# EAGLE board extender panel (EAGLE 6.3)
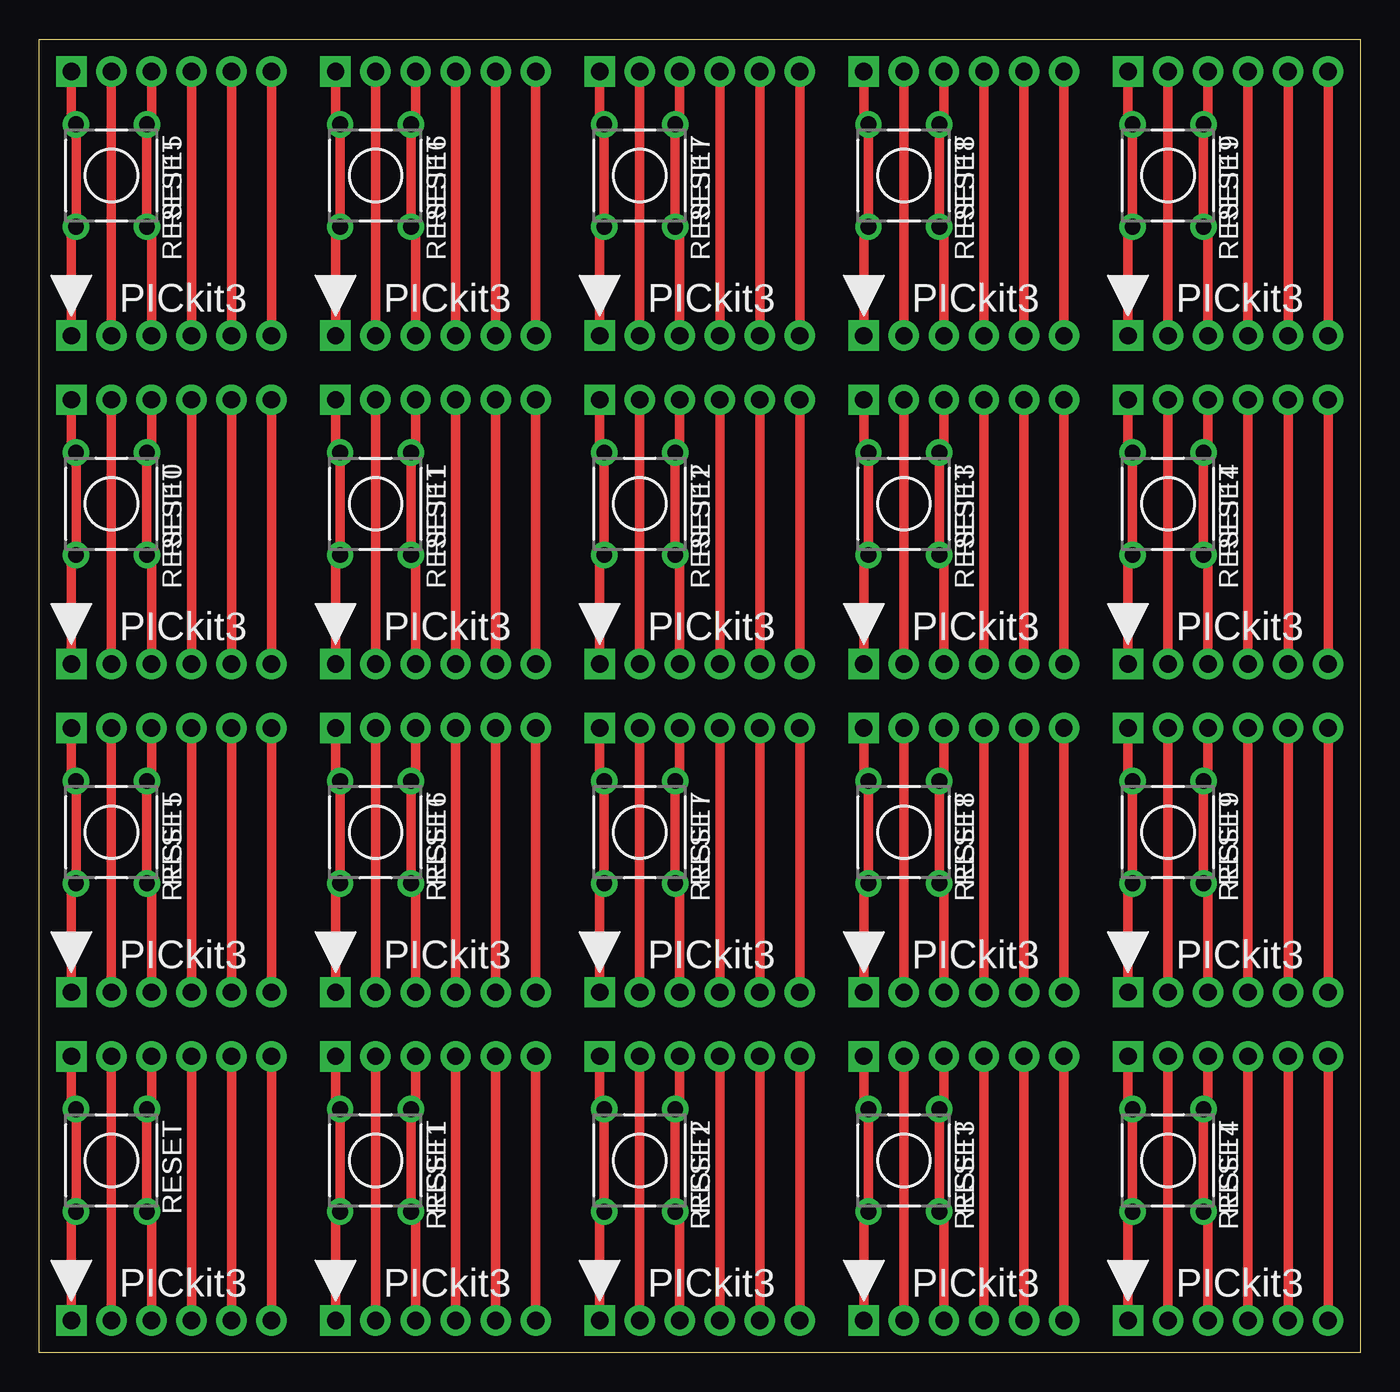
[diagram p0: board, top side]

Size 83.82 x 83.31 mm. Coordinates in mm from the lower left corner, seen from the top.
Outline: 0,83.31 83.82,83.31 83.82,0 0,0 0,83.31
Copper layers (1*16): Top 0.035mm / dielectric 1.5mm / Bottom 0.035mm
Design rules "default": minimum track width 10mil, minimum drill 24mil, track to track 8mil, track to pad 8mil, pad to pad 8mil, via to via 8mil, smd to smd 8mil, copper to edge 40mil, drill to drill 8mil, minimum pad ring 10mil, minimum via ring 8mil, stop-mask expansion 4mil, vias tented up to drill 0mil, thermal gap 10mil

## Footprints (pad centres in the part's own frame; a part is rotated, then mirrored left to right if it is on the bottom)
TL1105 = drill 1 pad 1.676: 1 -2.25,3.25; 2 2.25,3.25; 3 -2.25,-3.25; 4 2.25,-3.25
PINS_6_PICKIT3 = drill 1.1 pad 1.93 square: 1 0,0 | drill 1.1 pad 1.93: 2 0,-2.54; 3 0,-5.08; 4 0,-7.62; 5 0,-10.16; 6 0,-12.7
PINS_6 = drill 1.1 pad 1.93 square: 1 0,0 | drill 1.1 pad 1.93: 2 2.54,0; 3 5.08,0; 4 7.62,0; 5 10.16,0; 6 12.7,0

## Placement (x,y rotation side)
RESET  [TL1105]  4.57,12.19 180 top
RESET1  [TL1105]  21.34,12.19 180 top
RESET2  [TL1105]  38.1,12.19 180 top
RESET3  [TL1105]  54.86,12.19 180 top
RESET4  [TL1105]  71.63,12.19 180 top
RESET5  [TL1105]  4.57,33.02 180 top
RESET6  [TL1105]  21.34,33.02 180 top
RESET7  [TL1105]  38.1,33.02 180 top
RESET8  [TL1105]  54.86,33.02 180 top
RESET9  [TL1105]  71.63,33.02 180 top
RESET10  [TL1105]  4.57,53.85 180 top
RESET11  [TL1105]  21.34,53.85 180 top
RESET12  [TL1105]  38.1,53.85 180 top
RESET13  [TL1105]  54.86,53.85 180 top
RESET14  [TL1105]  71.63,53.85 180 top
RESET15  [TL1105]  4.57,74.68 180 top
RESET16  [TL1105]  21.34,74.68 180 top
RESET17  [TL1105]  38.1,74.68 180 top
RESET18  [TL1105]  54.86,74.68 180 top
RESET19  [TL1105]  71.63,74.68 180 top
U$1  PICKIT3  [PINS_6_PICKIT3]  2.03,2.03 90 top
U$2  PICKIT3  [PINS_6_PICKIT3]  18.8,2.03 90 top
U$3  PICKIT3PLAIN  [PINS_6]  2.03,18.8 0 top
U$4  PICKIT3PLAIN  [PINS_6]  18.8,18.8 0 top
U$5  PICKIT3  [PINS_6_PICKIT3]  35.56,2.03 90 top
U$6  PICKIT3PLAIN  [PINS_6]  35.56,18.8 0 top
U$7  PICKIT3  [PINS_6_PICKIT3]  52.32,2.03 90 top
U$8  PICKIT3PLAIN  [PINS_6]  52.32,18.8 0 top
U$9  PICKIT3  [PINS_6_PICKIT3]  69.09,2.03 90 top
U$10  PICKIT3PLAIN  [PINS_6]  69.09,18.8 0 top
U$11  PICKIT3  [PINS_6_PICKIT3]  2.03,22.86 90 top
U$12  PICKIT3PLAIN  [PINS_6]  2.03,39.62 0 top
U$13  PICKIT3  [PINS_6_PICKIT3]  18.8,22.86 90 top
U$14  PICKIT3PLAIN  [PINS_6]  18.8,39.62 0 top
U$15  PICKIT3  [PINS_6_PICKIT3]  35.56,22.86 90 top
U$16  PICKIT3PLAIN  [PINS_6]  35.56,39.62 0 top
U$17  PICKIT3  [PINS_6_PICKIT3]  52.32,22.86 90 top
U$18  PICKIT3PLAIN  [PINS_6]  52.32,39.62 0 top
U$19  PICKIT3  [PINS_6_PICKIT3]  69.09,22.86 90 top
U$20  PICKIT3PLAIN  [PINS_6]  69.09,39.62 0 top
U$21  PICKIT3  [PINS_6_PICKIT3]  2.03,43.69 90 top
U$22  PICKIT3PLAIN  [PINS_6]  2.03,60.45 0 top
U$23  PICKIT3  [PINS_6_PICKIT3]  18.8,43.69 90 top
U$24  PICKIT3PLAIN  [PINS_6]  18.8,60.45 0 top
U$25  PICKIT3  [PINS_6_PICKIT3]  35.56,43.69 90 top
U$26  PICKIT3PLAIN  [PINS_6]  35.56,60.45 0 top
U$27  PICKIT3  [PINS_6_PICKIT3]  52.32,43.69 90 top
U$28  PICKIT3PLAIN  [PINS_6]  52.32,60.45 0 top
U$29  PICKIT3  [PINS_6_PICKIT3]  69.09,43.69 90 top
U$30  PICKIT3PLAIN  [PINS_6]  69.09,60.45 0 top
U$31  PICKIT3  [PINS_6_PICKIT3]  2.03,64.52 90 top
U$32  PICKIT3PLAIN  [PINS_6]  2.03,81.28 0 top
U$33  PICKIT3  [PINS_6_PICKIT3]  18.8,64.52 90 top
U$34  PICKIT3PLAIN  [PINS_6]  18.8,81.28 0 top
U$35  PICKIT3  [PINS_6_PICKIT3]  35.56,64.52 90 top
U$36  PICKIT3PLAIN  [PINS_6]  35.56,81.28 0 top
U$37  PICKIT3  [PINS_6_PICKIT3]  52.32,64.52 90 top
U$38  PICKIT3PLAIN  [PINS_6]  52.32,81.28 0 top
U$39  PICKIT3  [PINS_6_PICKIT3]  69.09,64.52 90 top
U$40  PICKIT3PLAIN  [PINS_6]  69.09,81.28 0 top

## Library data of the parts
RESET RESET1-RESET19 U$1-U$40 = nolan-utsa

## Nets
N$1: RESET.2 RESET.4 U$1.1 U$3.1
N$2: U$1.2 U$3.2
N$3: RESET.1 RESET.3 U$1.3 U$3.3
N$4: U$1.4 U$3.4
N$5: U$1.5 U$3.5
N$6: U$1.6 U$3.6
N$7: RESET1.2 RESET1.4 U$2.1 U$4.1
N$8: U$2.2 U$4.2
N$9: RESET1.1 RESET1.3 U$2.3 U$4.3
N$10: U$2.4 U$4.4
N$11: U$2.5 U$4.5
N$12: U$2.6 U$4.6
N$13: RESET2.2 RESET2.4 U$5.1 U$6.1
N$14: U$5.2 U$6.2
N$15: RESET2.1 RESET2.3 U$5.3 U$6.3
N$16: U$5.4 U$6.4
N$17: U$5.5 U$6.5
N$18: U$5.6 U$6.6
N$19: RESET3.2 RESET3.4 U$7.1 U$8.1
N$20: U$7.2 U$8.2
N$21: RESET3.1 RESET3.3 U$7.3 U$8.3
N$22: U$7.4 U$8.4
N$23: U$7.5 U$8.5
N$24: U$7.6 U$8.6
N$25: RESET4.2 RESET4.4 U$9.1 U$10.1
N$26: U$9.2 U$10.2
N$27: RESET4.1 RESET4.3 U$9.3 U$10.3
N$28: U$9.4 U$10.4
N$29: U$9.5 U$10.5
N$30: U$9.6 U$10.6
N$31: RESET5.2 RESET5.4 U$11.1 U$12.1
N$32: U$11.2 U$12.2
N$33: RESET5.1 RESET5.3 U$11.3 U$12.3
N$34: U$11.4 U$12.4
N$35: U$11.5 U$12.5
N$36: U$11.6 U$12.6
N$37: RESET6.2 RESET6.4 U$13.1 U$14.1
N$38: U$13.2 U$14.2
N$39: RESET6.1 RESET6.3 U$13.3 U$14.3
N$40: U$13.4 U$14.4
N$41: U$13.5 U$14.5
N$42: U$13.6 U$14.6
N$43: RESET7.2 RESET7.4 U$15.1 U$16.1
N$44: U$15.2 U$16.2
N$45: RESET7.1 RESET7.3 U$15.3 U$16.3
N$46: U$15.4 U$16.4
N$47: U$15.5 U$16.5
N$48: U$15.6 U$16.6
N$49: RESET8.2 RESET8.4 U$17.1 U$18.1
N$50: U$17.2 U$18.2
N$51: RESET8.1 RESET8.3 U$17.3 U$18.3
N$52: U$17.4 U$18.4
N$53: U$17.5 U$18.5
N$54: U$17.6 U$18.6
N$55: RESET9.2 RESET9.4 U$19.1 U$20.1
N$56: U$19.2 U$20.2
N$57: RESET9.1 RESET9.3 U$19.3 U$20.3
N$58: U$19.4 U$20.4
N$59: U$19.5 U$20.5
N$60: U$19.6 U$20.6
N$61: RESET10.2 RESET10.4 U$21.1 U$22.1
N$62: U$21.2 U$22.2
N$63: RESET10.1 RESET10.3 U$21.3 U$22.3
N$64: U$21.4 U$22.4
N$65: U$21.5 U$22.5
N$66: U$21.6 U$22.6
N$67: RESET11.2 RESET11.4 U$23.1 U$24.1
N$68: U$23.2 U$24.2
N$69: RESET11.1 RESET11.3 U$23.3 U$24.3
N$70: U$23.4 U$24.4
N$71: U$23.5 U$24.5
N$72: U$23.6 U$24.6
N$73: RESET12.2 RESET12.4 U$25.1 U$26.1
N$74: U$25.2 U$26.2
N$75: RESET12.1 RESET12.3 U$25.3 U$26.3
N$76: U$25.4 U$26.4
N$77: U$25.5 U$26.5
N$78: U$25.6 U$26.6
N$79: RESET13.2 RESET13.4 U$27.1 U$28.1
N$80: U$27.2 U$28.2
N$81: RESET13.1 RESET13.3 U$27.3 U$28.3
N$82: U$27.4 U$28.4
N$83: U$27.5 U$28.5
N$84: U$27.6 U$28.6
N$85: RESET14.2 RESET14.4 U$29.1 U$30.1
N$86: U$29.2 U$30.2
N$87: RESET14.1 RESET14.3 U$29.3 U$30.3
N$88: U$29.4 U$30.4
N$89: U$29.5 U$30.5
N$90: U$29.6 U$30.6
N$91: RESET15.2 RESET15.4 U$31.1 U$32.1
N$92: U$31.2 U$32.2
N$93: RESET15.1 RESET15.3 U$31.3 U$32.3
N$94: U$31.4 U$32.4
N$95: U$31.5 U$32.5
N$96: U$31.6 U$32.6
N$97: RESET16.2 RESET16.4 U$33.1 U$34.1
N$98: U$33.2 U$34.2
N$99: RESET16.1 RESET16.3 U$33.3 U$34.3
N$100: U$33.4 U$34.4
N$101: U$33.5 U$34.5
N$102: U$33.6 U$34.6
N$103: RESET17.2 RESET17.4 U$35.1 U$36.1
N$104: U$35.2 U$36.2
N$105: RESET17.1 RESET17.3 U$35.3 U$36.3
N$106: U$35.4 U$36.4
N$107: U$35.5 U$36.5
N$108: U$35.6 U$36.6
N$109: RESET18.2 RESET18.4 U$37.1 U$38.1
N$110: U$37.2 U$38.2
N$111: RESET18.1 RESET18.3 U$37.3 U$38.3
N$112: U$37.4 U$38.4
N$113: U$37.5 U$38.5
N$114: U$37.6 U$38.6
N$115: RESET19.2 RESET19.4 U$39.1 U$40.1
N$116: U$39.2 U$40.2
N$117: RESET19.1 RESET19.3 U$39.3 U$40.3
N$118: U$39.4 U$40.4
N$119: U$39.5 U$40.5
N$120: U$39.6 U$40.6

## Tracks (layer width: path | path; a pad name or v marks a point on that pad's centre or on a via)
N$1
  Top 0.61: U$3.1 2.03,15.73 RESET.4 RESET.2 2.03,8.65 U$1.1
N$2
  Top 0.61: U$3.2 U$1.2
N$3
  Top 0.61: U$3.3 7.11,15.73 RESET.3 RESET.1 7.11,8.65 U$1.3
N$4
  Top 0.61: U$3.4 U$1.4
N$5
  Top 0.61: U$3.5 U$1.5
N$6
  Top 0.61: U$3.6 U$1.6
N$7
  Top 0.61: U$4.1 18.8,15.73 RESET1.4 RESET1.2 18.8,8.65 U$2.1
N$8
  Top 0.61: U$4.2 U$2.2
N$9
  Top 0.61: U$4.3 23.88,15.73 RESET1.3 RESET1.1 23.88,8.65 U$2.3
N$10
  Top 0.61: U$4.4 U$2.4
N$11
  Top 0.61: U$4.5 U$2.5
N$12
  Top 0.61: U$4.6 U$2.6
N$13
  Top 0.61: U$6.1 35.56,15.73 RESET2.4 RESET2.2 35.56,8.65 U$5.1
N$14
  Top 0.61: U$6.2 U$5.2
N$15
  Top 0.61: U$6.3 40.64,15.73 RESET2.3 RESET2.1 40.64,8.65 U$5.3
N$16
  Top 0.61: U$6.4 U$5.4
N$17
  Top 0.61: U$6.5 U$5.5
N$18
  Top 0.61: U$6.6 U$5.6
N$19
  Top 0.61: U$8.1 52.32,15.73 RESET3.4 RESET3.2 52.32,8.65 U$7.1
N$20
  Top 0.61: U$8.2 U$7.2
N$21
  Top 0.61: U$8.3 57.4,15.73 RESET3.3 RESET3.1 57.4,8.65 U$7.3
N$22
  Top 0.61: U$8.4 U$7.4
N$23
  Top 0.61: U$8.5 U$7.5
N$24
  Top 0.61: U$8.6 U$7.6
N$25
  Top 0.61: U$10.1 69.09,15.73 RESET4.4 RESET4.2 69.09,8.65 U$9.1
N$26
  Top 0.61: U$10.2 U$9.2
N$27
  Top 0.61: U$10.3 74.17,15.73 RESET4.3 RESET4.1 74.17,8.65 U$9.3
N$28
  Top 0.61: U$10.4 U$9.4
N$29
  Top 0.61: U$10.5 U$9.5
N$30
  Top 0.61: U$10.6 U$9.6
N$31
  Top 0.61: U$12.1 2.03,36.56 RESET5.4 RESET5.2 2.03,29.48 U$11.1
N$32
  Top 0.61: U$12.2 U$11.2
N$33
  Top 0.61: U$12.3 7.11,36.56 RESET5.3 RESET5.1 7.11,29.48 U$11.3
N$34
  Top 0.61: U$12.4 U$11.4
N$35
  Top 0.61: U$12.5 U$11.5
N$36
  Top 0.61: U$12.6 U$11.6
N$37
  Top 0.61: U$14.1 18.8,36.56 RESET6.4 RESET6.2 18.8,29.48 U$13.1
N$38
  Top 0.61: U$14.2 U$13.2
N$39
  Top 0.61: U$14.3 23.88,36.56 RESET6.3 RESET6.1 23.88,29.48 U$13.3
N$40
  Top 0.61: U$14.4 U$13.4
N$41
  Top 0.61: U$14.5 U$13.5
N$42
  Top 0.61: U$14.6 U$13.6
N$43
  Top 0.61: U$16.1 35.56,36.56 RESET7.4 RESET7.2 35.56,29.48 U$15.1
N$44
  Top 0.61: U$16.2 U$15.2
N$45
  Top 0.61: U$16.3 40.64,36.56 RESET7.3 RESET7.1 40.64,29.48 U$15.3
N$46
  Top 0.61: U$16.4 U$15.4
N$47
  Top 0.61: U$16.5 U$15.5
N$48
  Top 0.61: U$16.6 U$15.6
N$49
  Top 0.61: U$18.1 52.32,36.56 RESET8.4 RESET8.2 52.32,29.48 U$17.1
N$50
  Top 0.61: U$18.2 U$17.2
N$51
  Top 0.61: U$18.3 57.4,36.56 RESET8.3 RESET8.1 57.4,29.48 U$17.3
N$52
  Top 0.61: U$18.4 U$17.4
N$53
  Top 0.61: U$18.5 U$17.5
N$54
  Top 0.61: U$18.6 U$17.6
N$55
  Top 0.61: U$20.1 69.09,36.56 RESET9.4 RESET9.2 69.09,29.48 U$19.1
N$56
  Top 0.61: U$20.2 U$19.2
N$57
  Top 0.61: U$20.3 74.17,36.56 RESET9.3 RESET9.1 74.17,29.48 U$19.3
N$58
  Top 0.61: U$20.4 U$19.4
N$59
  Top 0.61: U$20.5 U$19.5
N$60
  Top 0.61: U$20.6 U$19.6
N$61
  Top 0.61: U$22.1 2.03,57.39 RESET10.4 RESET10.2 2.03,50.31 U$21.1
N$62
  Top 0.61: U$22.2 U$21.2
N$63
  Top 0.61: U$22.3 7.11,57.39 RESET10.3 RESET10.1 7.11,50.31 U$21.3
N$64
  Top 0.61: U$22.4 U$21.4
N$65
  Top 0.61: U$22.5 U$21.5
N$66
  Top 0.61: U$22.6 U$21.6
N$67
  Top 0.61: U$24.1 18.8,57.39 RESET11.4 RESET11.2 18.8,50.31 U$23.1
N$68
  Top 0.61: U$24.2 U$23.2
N$69
  Top 0.61: U$24.3 23.88,57.39 RESET11.3 RESET11.1 23.88,50.31 U$23.3
N$70
  Top 0.61: U$24.4 U$23.4
N$71
  Top 0.61: U$24.5 U$23.5
N$72
  Top 0.61: U$24.6 U$23.6
N$73
  Top 0.61: U$26.1 35.56,57.39 RESET12.4 RESET12.2 35.56,50.31 U$25.1
N$74
  Top 0.61: U$26.2 U$25.2
N$75
  Top 0.61: U$26.3 40.64,57.39 RESET12.3 RESET12.1 40.64,50.31 U$25.3
N$76
  Top 0.61: U$26.4 U$25.4
N$77
  Top 0.61: U$26.5 U$25.5
N$78
  Top 0.61: U$26.6 U$25.6
N$79
  Top 0.61: U$28.1 52.32,57.39 RESET13.4 RESET13.2 52.32,50.31 U$27.1
N$80
  Top 0.61: U$28.2 U$27.2
N$81
  Top 0.61: U$28.3 57.4,57.39 RESET13.3 RESET13.1 57.4,50.31 U$27.3
N$82
  Top 0.61: U$28.4 U$27.4
N$83
  Top 0.61: U$28.5 U$27.5
N$84
  Top 0.61: U$28.6 U$27.6
N$85
  Top 0.61: U$30.1 69.09,57.39 RESET14.4 RESET14.2 69.09,50.31 U$29.1
N$86
  Top 0.61: U$30.2 U$29.2
N$87
  Top 0.61: U$30.3 74.17,57.39 RESET14.3 RESET14.1 74.17,50.31 U$29.3
N$88
  Top 0.61: U$30.4 U$29.4
N$89
  Top 0.61: U$30.5 U$29.5
N$90
  Top 0.61: U$30.6 U$29.6
N$91
  Top 0.61: U$32.1 2.03,78.22 RESET15.4 RESET15.2 2.03,71.14 U$31.1
N$92
  Top 0.61: U$32.2 U$31.2
N$93
  Top 0.61: U$32.3 7.11,78.22 RESET15.3 RESET15.1 7.11,71.14 U$31.3
N$94
  Top 0.61: U$32.4 U$31.4
N$95
  Top 0.61: U$32.5 U$31.5
N$96
  Top 0.61: U$32.6 U$31.6
N$97
  Top 0.61: U$34.1 18.8,78.22 RESET16.4 RESET16.2 18.8,71.14 U$33.1
N$98
  Top 0.61: U$34.2 U$33.2
N$99
  Top 0.61: U$34.3 23.88,78.22 RESET16.3 RESET16.1 23.88,71.14 U$33.3
N$100
  Top 0.61: U$34.4 U$33.4
N$101
  Top 0.61: U$34.5 U$33.5
N$102
  Top 0.61: U$34.6 U$33.6
N$103
  Top 0.61: U$36.1 35.56,78.22 RESET17.4 RESET17.2 35.56,71.14 U$35.1
N$104
  Top 0.61: U$36.2 U$35.2
N$105
  Top 0.61: U$36.3 40.64,78.22 RESET17.3 RESET17.1 40.64,71.14 U$35.3
N$106
  Top 0.61: U$36.4 U$35.4
N$107
  Top 0.61: U$36.5 U$35.5
N$108
  Top 0.61: U$36.6 U$35.6
N$109
  Top 0.61: U$38.1 52.32,78.22 RESET18.4 RESET18.2 52.32,71.14 U$37.1
N$110
  Top 0.61: U$38.2 U$37.2
N$111
  Top 0.61: U$38.3 57.4,78.22 RESET18.3 RESET18.1 57.4,71.14 U$37.3
N$112
  Top 0.61: U$38.4 U$37.4
N$113
  Top 0.61: U$38.5 U$37.5
N$114
  Top 0.61: U$38.6 U$37.6
N$115
  Top 0.61: U$40.1 69.09,78.22 RESET19.4 RESET19.2 69.09,71.14 U$39.1
N$116
  Top 0.61: U$40.2 U$39.2
N$117
  Top 0.61: U$40.3 74.17,78.22 RESET19.3 RESET19.1 74.17,71.14 U$39.3
N$118
  Top 0.61: U$40.4 U$39.4
N$119
  Top 0.61: U$40.5 U$39.5
N$120
  Top 0.61: U$40.6 U$39.6

## Text on the board
tPlace: PICkit3 | PICkit3 | PICkit3 | PICkit3 | PICkit3 | PICkit3 | PICkit3 | PICkit3 | PICkit3 | PICkit3 | PICkit3 | PICkit3 | PICkit3 | PICkit3 | PICkit3 | PICkit3 | PICkit3 | PICkit3 | PICkit3 | PICkit3
_tNames: RESET | RESET | RESET | RESET | RESET | RESET | RESET | RESET | RESET | RESET | RESET | RESET | RESET | RESET | RESET | RESET | RESET | RESET | RESET | RESET